# Altium PCB Tigershark 3D R2.3a - TR.PcbDoc (part 2 of 4)
Units mil, origin at the board's own origin, x right, y up, seen from the top; angles counter-clockwise.
Board outline 4100 x 4050 mil, 4 copper layers (Top Layer, Groun Plane, Power Plane, Bottom Layer), stack 61.73 mil thick; 365 components, 237 nets, 1145 pads, 790 vias.
Unrouted connection lines stored in the file: 214.
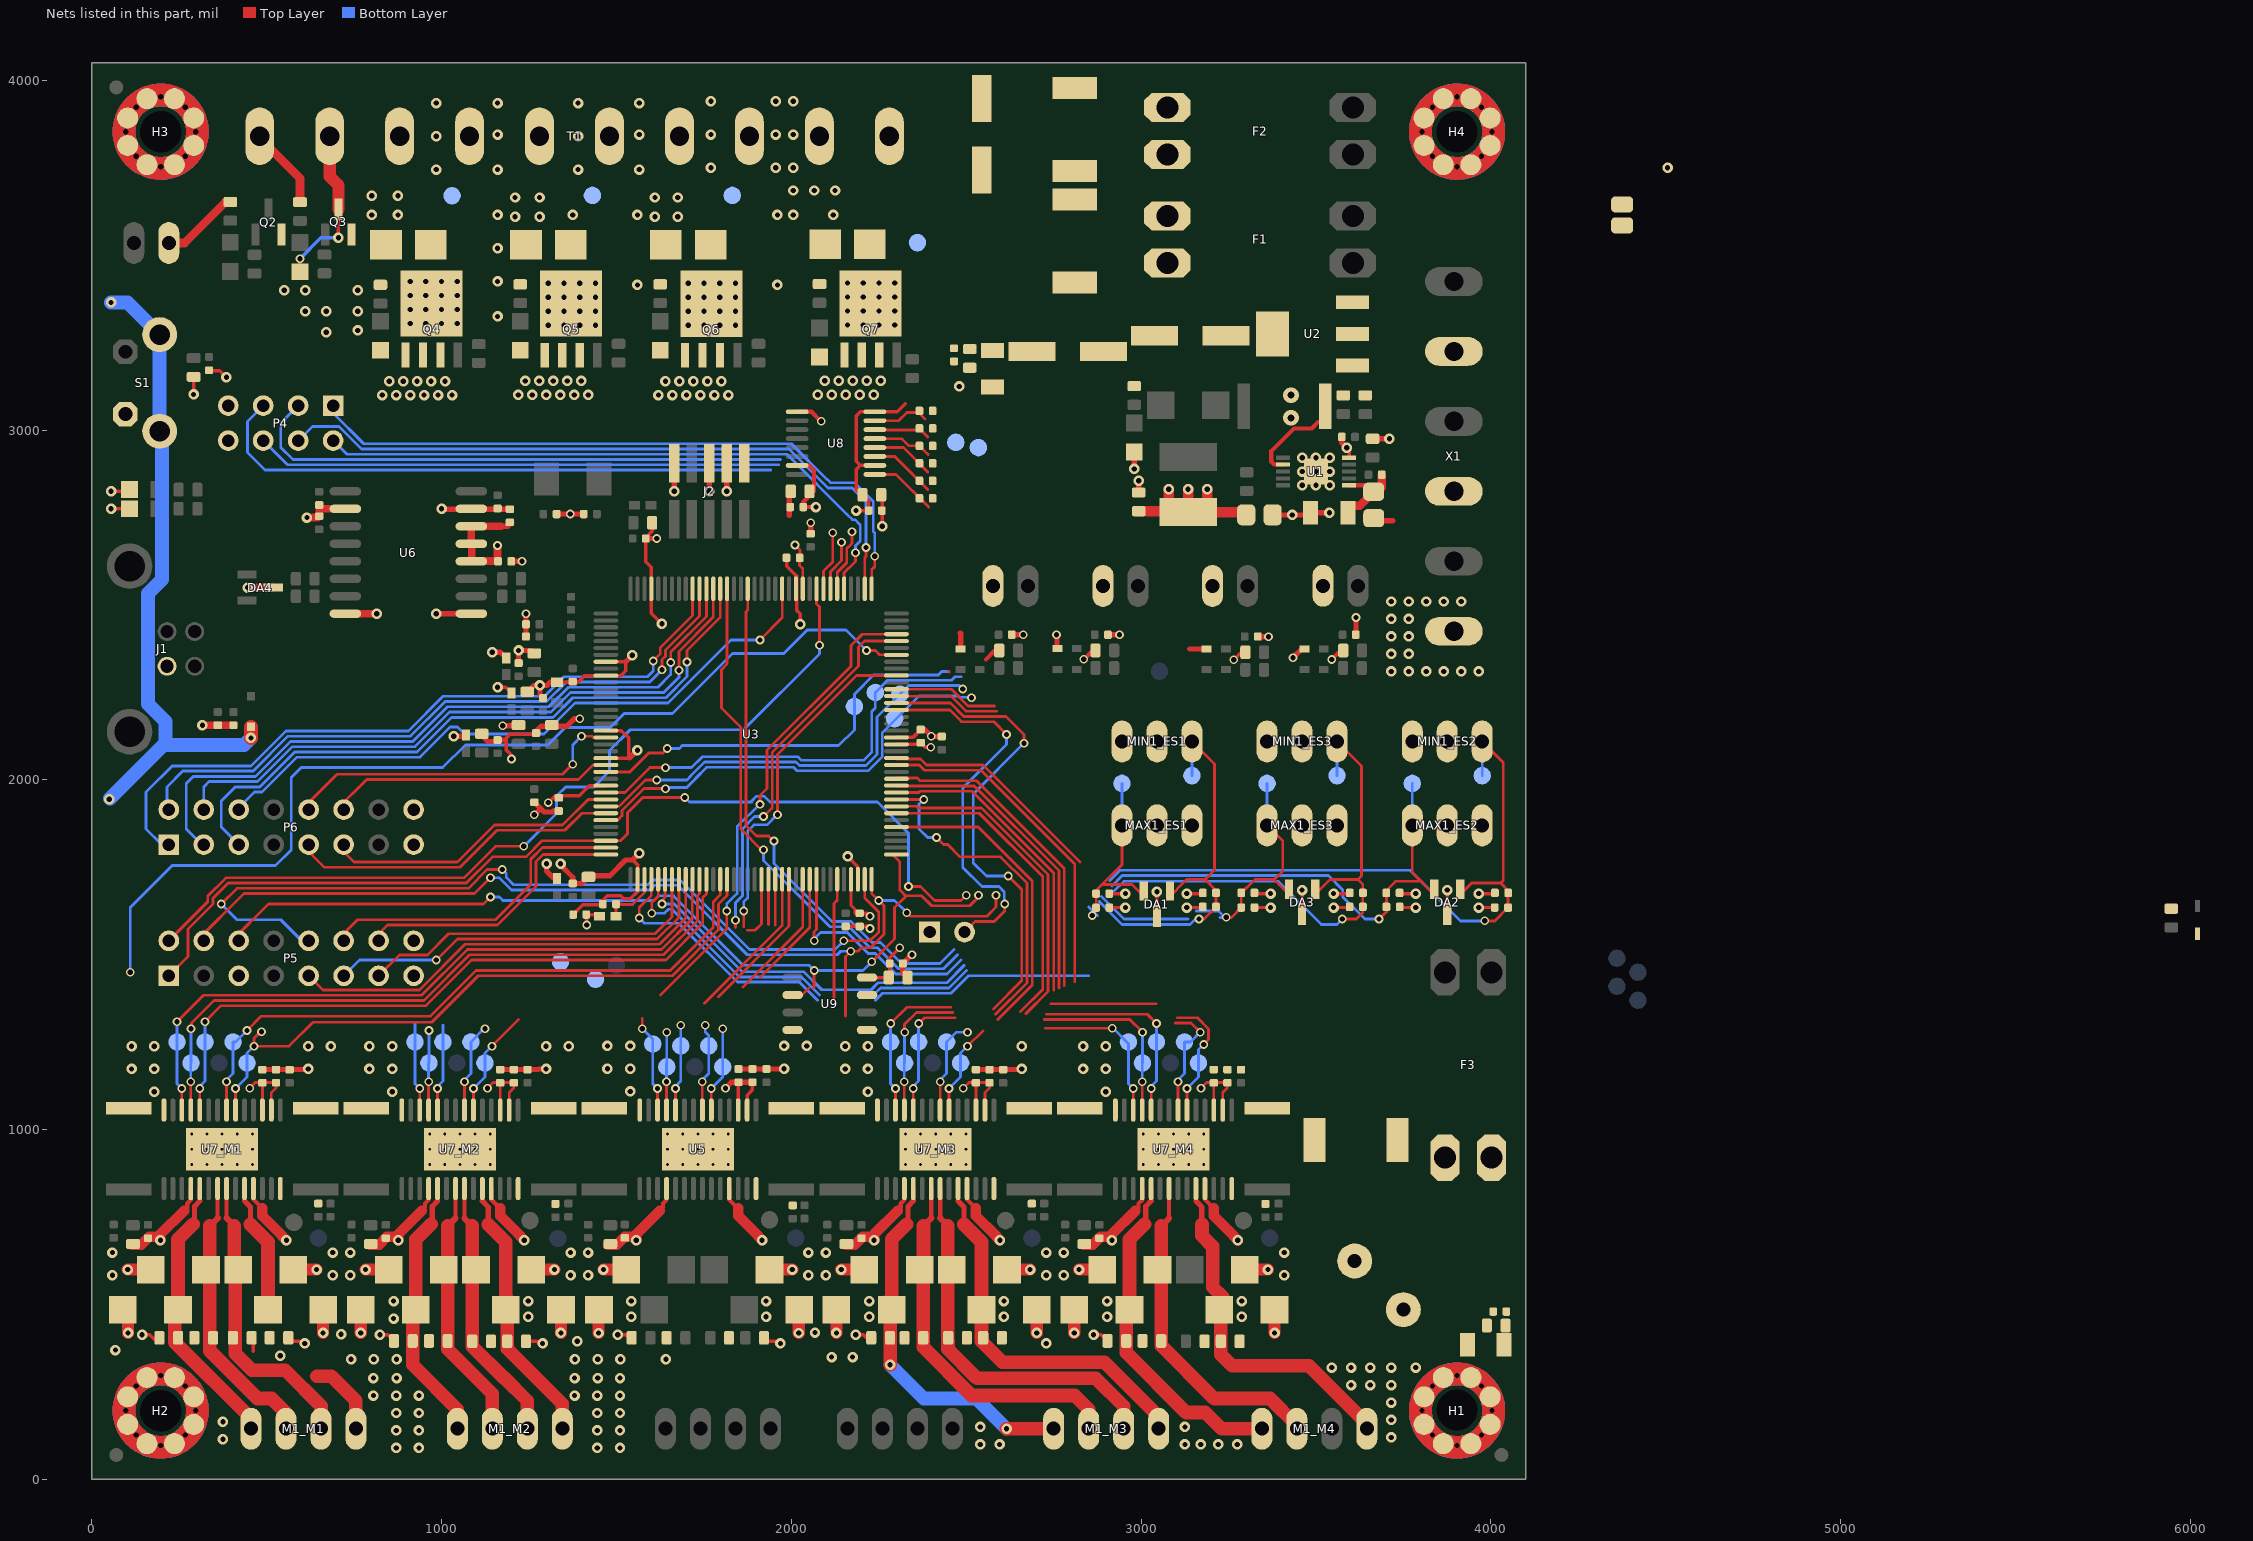
[diagram p4: the nets of this part, all layers, seen from the top]

## Via types
v1: diameter 30, hole 15, Top Layer to Bottom Layer, tented both sides, 411 vias
v2: diameter 25, hole 15, Top Layer to Bottom Layer, tented both sides, 207 vias
v3: diameter 19.68, hole 7.87, Top Layer to Bottom Layer, 75 vias
v4: diameter 30, hole 15, Top Layer to Bottom Layer, tented bottom, 64 vias
v5: diameter 25, hole 15, Top Layer to Bottom Layer, 21 vias
v6: diameter 30, hole 15, Top Layer to Bottom Layer, 9 vias
v7: diameter 45, hole 20, Top Layer to Bottom Layer, tented both sides, 2 vias
v8: diameter 25, hole 15, Top Layer to Bottom Layer, tented bottom, 1 vias

## Nets (pads, with @x,y where several pads share a name; then routed paths per layer and width w, separated by ;. In a path a pad name is that pad's centre, name@x,y a point inside that pad or via, vN(x,y) a via of type N, cw(c..) or ccw(c..) an arc to the next point about the centre after c; other vN are vias at no path point)
3.3VCC: C12_M1.2 C12_M2.2 C12_M3.2 C12_M4.2 C14_M1.2 C14_M2.2 C14_M3.2 C14_M4.2 C18.1 C25.2 C26.2 C29.2 C34.1 C45.1 C46.1 C47.1 C48.1 C56.1 C64.1 C69.2 C70.2 C74.1 FB5.1 FB6.1 FB7.1 FB8.1 FB9.1 J2.1 MAX1_ES1.3 MAX1_ES2.3 MAX1_ES3.3 MIN1_ES1.3 MIN1_ES2.3 MIN1_ES3.3 P1.1 P4.8 P5.16 P6.16 R2_ES1.2 R2_ES2.2 R2_ES3.2 R3_ES1.2 R3_ES2.2 R3_ES3.2 R6.2 R11.2 R19_TR1.2 R19_TR2.2 R19_TR3.2 R19_TR4.2 R21.2 U2.3 U3.11 U3.62 U3.105 U3.125 U5.16 U5.17 U6.12 U6.13 U6.14 U7_M1.16 U7_M1.17 U7_M2.16 U7_M2.17 U7_M3.16 U7_M3.17 U7_M4.16 U7_M4.17 U8.2 U8.8 U9.8 | length 3597.4
  Top Layer w8: v2(451.23,1118.74) 467.23,1134.74 C12_M1.2@486.23,1134.74 ; U7_M1.17@487.65,1057.2 487.65,1133.32 C12_M1.2@486.23,1134.74 ; U7_M1.16@511.23,1059.21 513.24,1057.2 513.24,1105.75 526.23,1118.74 C14_M1.2@526.23,1133.74 ; C14_M1.2@526.23,1134.74 C12_M1.2@486.23,1134.74 ; v2(1131.23,1118.74) 1147.23,1134.74 C12_M2.2@1166.23,1134.74 ; U7_M2.17@1167.65,1057.2 1167.65,1133.32 C12_M2.2@1166.23,1134.74 ; U7_M2.16@1191.23,1059.21 1193.24,1057.2 1193.24,1105.75 1206.23,1118.74 C14_M2.2@1206.23,1133.74 ; C14_M2.2@1206.23,1134.74 C12_M2.2@1166.23,1134.74 ; R6.2@1211.77,2155 R6.2@1215,2151.77 ; J2.1@1865,2904.92 J2.1@1865.08,2905 ; v2(2010.47,2671.46) 2024.47,2657.46 2024.47,2627.54 2023.56,2626.63 2023.56,2613.37 2032.64,2604.29 U3.11@2032.64,2546.46 ; U3.105@2170.43,1715.75 2170.43,1641.77 2181.1,1631.1 2181.1,1620.1 C45.1@2186.2,1615 ; v2(2491.23,1118.74) 2507.23,1134.74 C12_M3.2@2526.23,1134.74 ; U7_M3.17@2527.65,1057.2 2527.65,1133.32 C12_M3.2@2526.23,1134.74 ; U7_M3.16@2551.23,1059.21 2553.24,1057.2 2553.24,1105.75 2566.23,1118.74 C14_M3.2@2566.23,1133.74 ; C14_M3.2@2566.23,1134.74 C12_M3.2@2526.23,1134.74 ; R3_ES1.2@2909,1635 v1(2955,1635) ; v1(3130,1635) R2_ES1.2@3176,1635 ; v2(3171.23,1118.74) 3187.23,1134.74 C12_M4.2@3206.23,1134.74 ; U7_M4.17@3207.65,1057.2 3207.65,1133.32 C12_M4.2@3206.23,1134.74 ; U7_M4.16@3231.23,1059.21 3233.24,1057.2 3233.24,1105.75 3246.23,1118.74 C14_M4.2@3246.23,1133.74 ; C14_M4.2@3246.23,1134.74 C12_M4.2@3206.23,1134.74 ; R3_ES3.2@3324,1635 v1(3370,1635) ; v1(3550,1635) R2_ES3.2@3596,1635 ; R3_ES2.2@3739,1635 v1(3785,1635) ; v1(3965,1635) R2_ES2.2@4011,1635
  Top Layer w10: v1(291,3102) R21.2@291,3149.47 ; v1(1160,2265) 1183.62,2265 FB7.1@1200,2248.62 ; v2(1305,1935) 1324.5,1954.5 1393.54,1954.5 1422.51,1983.46 U3.62@1469.65,1983.46 ; v2(1415,1585) 1415,1613.7 C64.1@1413.7,1615 1446.38,1615 FB9.1@1451.38,1610 ; U5.17@1847.91,1056.94 C69.2@1847.91,1134.9 ; U5.16@1873.5,1056.94 1873.5,1098.49 1888.75,1113.74 C70.2@1888.75,1135.74 ; v1(2185,2770) C26.2@2221,2770 2221,2797.23 C25.2@2203.23,2815 ; C45.1@2195,1618.7 2216.3,1618.7 v2(2225,1610) ; C25.2@2205,2810 2185,2830 2185,2887.44 2196.58,2899.02 ; U9.8@2216.3,1435 C29.2@2278.23,1435 2281,1437.77 2281,1475 2280,1476 2280,1490 v2(2310,1520) ; U8.2@2238.78,2899.02 2196.58,2899.02 ; U3.125@2300.35,2101.57 C46.1@2365.57,2101.57 ; 2325.55,3075.55 2302.57,3052.57 U8.8@2238.78,3052.57 2197.13,3052.57 2185,3040.44 2185,2910.61 2196.58,2899.02 ; C46.1@2371,2105 2383,2093 v2(2398.5,2093) ; v2(3264.53,2343.23) 3286.3,2365 R19_TR4.2@3295,2365 ; R19_TR3.2@3574.06,2370.94 R19_TR3.2@3575,2370
  Top Layer w12: 2556,2344.57 2581.47,2370.04 R19_TR2.2@2594.23,2370.04 ; v2(2836,2344.57) 2861.47,2370.04 R19_TR1.2@2869.23,2370.04 ; v2(3544.53,2344.53) R19_TR3.2@3572.5,2372.5
  Top Layer w15: v1(1035,2125) 1059.72,2125 FB5.1@1060,2124.72 ; v1(1145,2365) 1168.62,2365 FB8.1@1185,2348.62 ; 1170,2725 1190,2725 C56.1@1201,2736 ; v2(1175,2155) 1201.77,2155 1206.77,2150 R6.2@1211.77,2155 ; v1(1300,1760) 1300,1739.72 FB6.1@1320,1719.72 ; v5(1811.26,1118.71) 1828.29,1135.74 C69.2@1848.75,1135.74 C70.2@1888.75,1135.74 ; C46.1@2370,2106 C46.1@2371,2105
  Top Layer w22: v2(1160,2670) 1160,2626 1086.12,2626 1086.12,2674 U6.13@1085.12,2675 U6.14@1085.12,2725 1170,2725
+5VCC: C11.1 C17.2 C20.2 C21.1 L1.2 R1.2 R7.2 R10.1 U2.1 U8.15 | length 691.1
  Top Layer w12: U8.15@2016.34,2899.02 2050.98,2899.02 2065,2885 2065,2825.88 2034,2794.88 2029.51,2781.51 C20.2@2029,2780 ; C20.2@2034,2780 v1(2070,2780)
  Top Layer w15: R7.2@3661.68,2975.35 3661.91,2975.57 v1(3709.69,2975.57)
  Top Layer w30: C11.1@2993,2768.23 3076.77,2768.23 3079,2766 v1(3079,2831) ; L1.2@3134,2766.52 v1(3134,2831) ; L1.2@3134.69,2765.83 C21.1@3292.02,2765.83 ; L1.2@3189,2770.83 v1(3189,2831)
+12VCC1: C7.1 C35.2 C66_M1.2 C66_M2.2 C66_M3.2 C66_M4.2 C80.1 C81.1 C82.2 D7.C F3.2 R30_M1.2 R30_M2.2 R30_M3.2 R30_M4.2 R36.2 U5.4 U5.11 U7_M1.4 U7_M1.11 U7_M2.4 U7_M2.11 U7_M3.4 U7_M3.11 U7_M4.4 U7_M4.11 | length 2331.6
  Top Layer w12: 263.75,768.74 272.75,777.74 272.75,789.25 282.92,799.42 U7_M1.4@282.92,832.8 ; U7_M1.11@462.06,832.8 462.06,800.43 487.49,775 ; 943.75,768.74 952.75,777.74 952.75,789.25 962.92,799.42 U7_M2.4@962.92,832.8 ; U7_M2.11@1142.06,832.8 1142.06,800.43 1167.49,775 ; 1623.78,768.71 1632.78,777.71 1632.78,789.22 1642.95,799.39 U5.4@1642.95,831.76 ; U5.11@1822.09,832.76 1822.09,800.4 1847.52,774.97 ; 2303.75,768.74 2312.75,777.74 2312.75,789.25 2322.92,799.42 U7_M3.4@2322.92,832.8 ; U7_M3.11@2502.06,832.8 2502.06,800.43 2527.49,775 ; 2983.75,768.74 2992.75,777.74 2992.75,789.25 3002.92,799.42 U7_M4.4@3002.92,831.8 U7_M4.4@3002.92,832.8 ; U7_M4.11@3182.06,832.8 3182.06,800.43 3207.49,775
  Top Layer w30: C66_M1.2@116.23,671.18 141.19,671.18 163.75,693.74 186.23,693.74 v1(196.23,683.74) 196.23,701.22 263.75,768.74 ; 487.49,775 487.49,753.69 544.99,696.19 544.99,694.98 v1(556.23,683.74) ; C66_M2.2@796.23,671.18 821.19,671.18 843.75,693.74 866.23,693.74 v1(876.23,683.74) 876.23,701.22 943.75,768.74 ; 1167.49,775 1167.49,753.69 1224.99,696.19 1224.99,694.98 v1(1236.23,683.74) ; C35.2@1476.26,671.15 1501.22,671.15 1523.78,693.71 1546.26,693.71 v1(1556.26,683.71) 1556.26,701.19 1623.78,768.71 ; 1847.52,774.97 1847.52,753.66 1905.02,696.16 1905.02,694.95 v1(1916.26,683.71) ; C66_M3.2@2156.23,671.18 2181.19,671.18 2203.75,693.74 2226.23,693.74 v1(2236.23,683.74) 2236.23,701.22 2303.75,768.74 ; 2527.49,775 2527.49,753.69 2584.99,696.19 2584.99,694.98 v1(2596.23,683.74) ; C66_M4.2@2836.23,671.18 2861.19,671.18 2883.75,693.74 2906.23,693.74 v1(2916.23,683.74) 2916.23,701.22 2983.75,768.74 ; 3207.49,775 3207.49,753.69 3264.99,696.19 3264.99,694.98 v1(3276.23,683.74)
  other v1: 870,90 935,90 1445,90 1510,90 2540,100 2595,100 3125,100 3170,100 3220,100 3275,100 375,115 3715,120 870,140 935,140 1445,140 1510,140 2540,150 3125,150 375,165 3715,170 870,190 935,190 1445,190 1510,190 3715,220 805,240 870,240 935,240 1380,240 1445,240 1510,240 3600,270 3655,270 3715,270 805,290 871.26,290 1380,290 1446.26,290 1510,290 3545,320 3600,320 3655,320 3715,320 3785,320 741.26,343.74 806.26,343.74 871.26,343.74 1381.26,343.74 1446.26,343.74 1511.26,343.74 1641.26,343.74 2115,350 2175,350 67.49,370 2728.75,388.74 1387.49,395 712.49,415 2067.49,420 862.49,460 1247.49,465 1542.49,465 1927.49,465 2222.49,465 2607.49,465 2902.49,465 3287.49,465 862.49,510 1247.49,510 1542.49,510 1927.49,510 2222.49,510 2607.49,510 2902.49,510 3287.49,510 58.75,583.74 688.75,583.74 738.75,583.74 1368.75,583.74 1418.75,583.74 2048.78,583.71 2098.78,583.71 2728.75,583.74 2778.75,583.74 3408.75,583.74 58.75,648.74 688.75,648.74 738.75,648.74 1368.75,648.74 1418.75,648.74 2048.78,648.71 2098.78,648.71 2728.75,648.74 2778.75,648.74 3408.75,648.74
+12VCC2: C9.1 C10.1 C16.1 C77.1 C78.1 C79.2 D6.C D12.2 D15.2 D17.2 F1.2 FAN-1.1 R13.2 R17.2 R47.2 R56.2 R60.2 R64.2 T1.1 T1.3 T1.5 T1.7 U1.1 | length 632.5
  Top Layer w12: U1.1@3594.17,2842.2 3638.17,2842.2 C10.1@3647.32,2833.05
  Top Layer w24: C9.1@3610.85,2783.57 3624.63,2783.57 3657.03,2815.98 C10.1@3668.69,2815.98 ; C10.1@3687.69,2834.98 R17.2@3687.69,2872.57
  Top Layer w25: FAN-1.1@230,3535 265,3535 382.34,3652.34 R13.2@396,3652.34 ; T1.1@480,3810 T1.1@495,3795 ; T1.1@480,3835 595,3720 R47.2@595,3651.77
  other v1: 1210,3610 1280,3610 1610,3610 1675,3610 800,3615 875,3615 1210,3665 1280,3665 1610,3665 1675,3665 800,3670 875,3670
+12VCC3: C15.1 D4.C D19.2 F2.2 R68.2 T1.9
  other v1: 2005,3615 2120,3615 2005,3685 2065,3685 2125,3685 2005,3750 4505,3750 2005,3845 2005,3940
AVREF: C65.1 FB9.2 U3.75 | length 168.5
  Top Layer w8: FB9.2@1498.62,1610 1498.62,1644.62 1499,1645 1513.47,1645 1514.47,1644 1546.24,1644 1579.88,1677.64 U3.75@1579.88,1715.75
BED_PWM: R71.2 TP38.1 U3.132 U8.7 | length 462.9
  Top Layer w8: U8.7@2238.78,3026.98 2306.98,3026.98 2330,3050 R71.2@2358.23,3050 ; U3.132@2300.35,2239.37 2456.18,2239.37 2499.05,2196.5 2586.5,2196.5 ; R71.2@2366,3055 2366,3047.22 2381.72,3031.5
DIR1: TP39_M1.1 U3.87 U7_M1.20 | length 1872.3
  Top Layer w8: U7_M1.20@410.88,1057.2 v2(410.88,1117.64) ; v2@482.49,1280 463.75,1261.26 v2(463.75,1238.74) 563.74,1238.74 632.24,1307.24 971.83,1307.24 1104.59,1440 1659.71,1440 1791.5,1571.79 1791.5,1644.73 1816.1,1669.34 U3.87@1816.1,1715.75
  Bottom Layer w8: v2(410.88,1117.64) 443.72,1150.48 TP39_M1.1@443.72,1190.77 443.72,1218.71 v2(463.75,1238.74)
  other v2: 485,1280
DIR2: TP39_M2.1 U3.93 U7_M2.20 | length 440.2
  Top Layer w8: U7_M2.20@1090.88,1057.2 v2(1090.88,1117.64) ; v2(1143.75,1238.74) 1220.01,1315 ; 1934.21,1586.79 U3.93@1934.21,1715.75
  Bottom Layer w8: v2(1090.88,1117.64) 1123.72,1150.48 TP39_M2.1@1123.72,1190.77 1123.72,1218.71 v2(1143.75,1238.74)
DIR3: TP39_M3.1 U3.116 U7_M3.20 | length 1203.5
  Top Layer w8: U3.116@2300.35,1924.41 2357.8,1924.41 2362.48,1919.72 2543.36,1919.72 2733.5,1729.59 2733.5,1395.01 2670,1331.51 ; U7_M3.20@2450.88,1057.2 v2(2450.88,1117.64) ; v2(2503.75,1238.74) 2547.49,1282.48
  Bottom Layer w8: v2(2450.88,1117.64) 2483.72,1150.48 TP39_M3.1@2483.72,1190.77 2483.72,1218.71 v2(2503.75,1238.74)
DIR4: TP39_M4.1 U3.123 U7_M4.20 | length 1006.1
  Top Layer w8: U3.123@2300.35,2062.2 2302.56,2060 2369.33,2060 2386.74,2042.59 2547.77,2042.59 2825,1765.37 ; 3103.7,1320 3160.72,1320 3192.49,1288.23 3192.49,1257.54 v2(3178.72,1243.77) ; U7_M4.20@3130.88,1057.2 v2(3130.88,1117.64)
  Bottom Layer w8: v2(3130.88,1117.64) 3163.72,1150.48 TP39_M4.1@3163.72,1190.77 3163.72,1228.77 v2(3178.72,1243.77)
DIR_EXP1: P6.11 U3.64 | length 864.5
  Top Layer w8: P6.11@700,1815 750,1765 1045.7,1765 1151.68,1870.98 1345.98,1870.98 1419.09,1944.09 U3.64@1469.65,1944.09
DIR_EXP2: P6.12 U3.59 | length 822.5
  Top Layer w8: P6.12@700,1915 786,2001 1391,2001 1432.52,2042.52 U3.59@1469.65,2042.52
DIR_Z: TP20.1 U3.99 U5.20 | length 582.8
  Top Layer w8: U5.20@1770.91,1057.17 v5(1770.91,1117.61) ; 1911.26,1436.55 2052.32,1577.62 U3.99@2052.32,1715.75
  Bottom Layer w8: v5(1770.91,1117.61) 1803.75,1150.45 TP20.1@1803.75,1179.74 v5(1803.75,1288.74)
EN1: TP32_M1.1 U3.86 U7_M1.21 | length 1855.5
  Top Layer w8: U7_M1.21@385.29,1057.2 v2(385.29,1137.05) ; v2(443.75,1283.74) 484.48,1324.47 967.85,1324.47 1098.38,1455 1653.49,1455 1776.5,1578.01 1776.5,1650.95 1796.42,1670.86 U3.86@1796.42,1715.75
  Bottom Layer w8: v2(385.29,1137.05) 385.29,1142.34 403.72,1160.77 TP32_M1.1@403.72,1250.77 410.78,1250.77 v2(443.75,1283.74)
EN2: TP32_M2.1 U3.92 U7_M2.21 | length 429.9
  Top Layer w8: U7_M2.21@1065.29,1057.2 v2(1065.29,1137.05) ; 1874.56,1570 1896.21,1570 1914.53,1588.31 U3.92@1914.53,1715.75
  Bottom Layer w8: v2(1065.29,1137.05) 1065.29,1142.34 1083.72,1160.77 TP32_M2.1@1083.72,1250.77 v2@1121.69,1288.74
  other v2: 1123.75,1288.74
EN3: TP32_M3.1 U3.115 U7_M3.21 | length 1178
  Top Layer w8: U3.115@2300.35,1904.72 2537.15,1904.72 2718.5,1723.37 2718.5,1401.22 2655,1337.72 ; U7_M3.21@2425.29,1057.2 v2(2425.29,1137.05)
  Bottom Layer w8: v2(2425.29,1137.05) 2425.29,1142.34 2443.72,1160.77 TP32_M3.1@2443.72,1250.77 2471.69,1278.74 v2(2503.75,1278.74)
EN4: TP32_M4.1 U3.122 U7_M4.21 | length 1603.5
  Top Layer w8: U3.122@2300.35,2042.52 2365.6,2042.52 2380.52,2027.59 2541.56,2027.59 2810,1759.15 2810,1423.79 ; 2741.28,1360 3042.49,1360 ; 3097.49,1305 3142.49,1305 v2(3168.72,1278.77) ; U7_M4.21@3105.29,1057.2 v2(3105.29,1137.05)
  Bottom Layer w8: v2(3105.29,1137.05) 3105.29,1142.34 3123.72,1160.77 TP32_M4.1@3123.72,1250.77 3140.72,1250.77 v2(3168.72,1278.77)
EN_EXP1: P6.9 U3.66 | length 960.7
  Top Layer w8: P6.9@600,1815 665,1750 1051.91,1750 1157.9,1855.98 1352.2,1855.98 1400.94,1904.72 U3.66@1469.65,1904.72
EN_EXP2: P6.10 U3.55 | length 990.4
  Top Layer w8: P6.10@600,1915 701,2016 1346,2016 v2(1375,2045) ; v2(1400,2125) 1430,2125 1433.74,2121.26 U3.55@1469.65,2121.26
  Bottom Layer w8: v2(1375,2045) 1375,2100 v2(1400,2125)
EN_Z: TP16.1 U3.98 U5.21 | length 632.3
  Top Layer w8: U5.21@1745.32,1057.17 v5(1745.32,1137.02) ; 1861.26,1407.77 2032.64,1579.15 U3.98@2032.64,1715.75
  Bottom Layer w8: v5(1745.32,1137.02) 1745.32,1142.31 1763.75,1160.74 1763.75,1268.74 1753.75,1278.74 v5(1753.75,1298.74)
ERASE: P1.2 U3.130 | length 1118.2
  Top Layer w8: U3.130@2300.35,2200 2453.13,2200 2486.63,2166.5 2578.5,2166.5 v2(2615,2130) ; P1.2@2495,1565 2525,1595 2580,1595 2610,1625 v2(2610,1645)
  Bottom Layer w8: v2(2610,1645) 2608.5,1646.5 2608.5,1679.73 2593.23,1695 2545,1695 2490,1750 2490,1976.36 2615,2101.36 v2(2615,2130)
EXP_CS2: P5.5 U3.138 | length 2854.3
  Top Layer w8: v2(2215,2370) 2240,2370 2252.52,2357.48 U3.138@2300.35,2357.48
  Bottom Layer w8: v2(110,1450) 110,1635 230,1755 525,1755 570,1800 570,2006.36 598.64,2035 1002.98,2035 1067.98,2100 1303.49,2100 1353.49,2150 1482.16,2150 1522.16,2190 1659.85,2190 1831.35,2361.5 1978.27,2361.5 2045.27,2428.5 2156.5,2428.5 v2(2215,2370)
FET_PWM1: R46.2 TP43.1 U3.60 U8.1 | length 1351.7
  Top Layer w8: U3.60@1469.65,2022.83 1537.83,2022.83 1592.1,2077.1 1632.1,2077.1 v2(1645,2090) ; U8.1@2238.78,2873.43 2299.22,2873.43 2392.66,2780 ; 2450,2310 2451.5,2308.5
  Bottom Layer w8: v2(1645,2090) 1680,2090 1687.89,2097.89 2132.89,2097.89 ; 2135,2097.89 2180,2142.89 2180,2245 2235,2300 2420,2300 2430,2310 2450,2310
FET_PWM2: R55.2 TP44.1 U3.63 U8.3 | length 1445.3
  Top Layer w8: U3.63@1469.65,1963.78 1524.03,1963.78 1595.25,2035 v2(1640,2035) ; U8.3@2238.78,2924.61 2295.39,2924.61 2390,2830
  Bottom Layer w8: v2(1640,2035) 1664.23,2035 ; 1664.23,2035.1 1714.44,2035.1 1745.23,2065.89 2019.11,2065.89 2029.11,2055.89 2206.56,2055.89 2230,2079.33 2230,2196.21 2240,2206.21 TP44.1@2240,2250 2275,2285 2458.23,2285 2468.23,2295 2485,2295
FET_PWM3: R59.2 TP45.1 U3.65 U8.4 | length 1419.2
  Top Layer w8: U3.65@1469.65,1924.41 1506.98,1924.41 1582.57,2000 v2(1615,2000) ; U8.4@2238.78,2950.2 2238.98,2950 2320,2950 2390,2880
  Bottom Layer w8: v2(1615,2000) 1701.21,2000 1711.5,2010.29 1711.5,2010.95 1751.44,2050.89 2012.9,2050.89 2022.9,2040.89 2212.77,2040.89 2245,2073.12 2245,2180 2335,2270 2480,2270 v2(2490,2260)
FET_PWM4: R63.2 TP46.1 U3.67 U8.5 | length 1422.7
  Top Layer w8: U3.67@1469.65,1885.04 1503.4,1885.04 1516.08,1897.72 1516.08,1912.29 1578.79,1975 v2(1640,1975) ; U8.5@2238.78,2975.8 2239.58,2975 2316.21,2975 2336.21,2955 R63.2@2366,2955 2391,2930
  Bottom Layer w8: v2(1640,1975) 1643.5,1978.5 1700.93,1978.5 1726.5,2004.07 1726.5,2004.73 1757.66,2035.89 2006.68,2035.89 2016.68,2025.89 2218.98,2025.89 2260,2066.91 2260,2135 2365,2240 2476.77,2240 2480.27,2236.5 2513.5,2236.5 v2(2515,2235)
FET_PWM5: R67.2 TP47.1 U3.133 U8.6 | length 460.4
  Top Layer w8: U8.6@2238.78,3001.39 2240.17,3000 R67.2@2365,3000 ; U3.133@2300.35,2259.06 2457.71,2259.06 2505.27,2211.5 2580.29,2211.5 ; R67.2@2366,3004 2390,2980
FGND: D8.C H1.1 H2.1 H3.1 H4.1 JP1.1 S1.3 S1.4 | length 1915.5
  Top Layer w40: v1(455,2120) D8.C@455,2151.69
  Bottom Layer w40: v1@52,1947 205,2100 435,2100 v1(455,2120) ; v1(55,3365) 102,3365 S1.3@194,3273 S1.4@194,2997 200.25,2990.75 200.25,2572.95 160,2532.7 160,2216.4 210,2166.4 210,2105
  Bottom Layer w50: 122.6,271.1 H2.1@126.85,266.85 ; 122.6,3778.9 H3.1@126.85,3783.15 ; 3828.9,3927.4 H4.1@3833.15,3923.15 ; H1.1@3973.15,266.85 3977.4,271.1
  other v1: 50,1945
FN1: D11.C Q3.3 T1.2 | length 467.3
  Top Layer w10: D11.C@595,3453 v2(595,3490) ; v1(705,3549.78) Q3.3@705,3630.43
  Top Layer w35: T1.2@680,3835 680,3725 705,3700 Q3.3@705,3630.43
  Bottom Layer w10: v2(595,3490) 654.78,3549.78 v1(705,3549.78)
GND: C1_ES1.1 C1_ES2.1 C1_ES3.1 C2_ES1.1 C2_ES2.1 C2_ES3.1 C3_M1.2 C3_M2.2 C3_M3.2 C3_M4.2 C5_M1.2 C5_M2.2 C5_M3.2 C5_M4.2 C6_M1.2 C6_M2.2 C6_M3.2 C6_M4.2 C7.2 C8_M1.2 C8_M2.2 C8_M3.2 C8_M4.2 C9.2 C10.2 C11.2 C12_M1.1 C12_M2.1 C12_M3.1 C12_M4.1 C13.1 C14_M1.1 C14_M2.1 C14_M3.1 C14_M4.1 C15.2 C16.2 C17.1 C18.2 C20.1 C21.2 C22.2 C23.2 C25.1 C26.1 C27.2 C28.1 C29.1 C30_TR1.2 C30_TR2.2 C30_TR3.2 C30_TR4.2 C32.1 C33.2 C34.2 C36.1 C37.2 C38.2 C39.2 C41.2 C42.2 C43.1 C44.1 C45.2 C46.2 C47.2 C48.2 C50.1 C51.1 C52.2 C53.2 C54.2 C55.1 C56.2 C57.2 C60.1 C61.2 C62.2 C63.1 C64.2 C65.2 C67.2 C69.1 C70.1 C71_M1.1 C71_M2.1 C71_M3.1 C71_M4.1 C72.2 C73.1 C74.2 C75_M1.1 C75_M2.1 C75_M3.1 C75_M4.1 C77.2 C78.2 C79.1 C80.2 C81.2 C82.1 D1.1 D4.A D5_TR1.A D5_TR2.A D5_TR3.A D5_TR4.A D6.A D7.A D20_M1.C D20_M2.C D20_M3.C D20_M4.C D21_M1.C D21_M2.C D21_M3.C D21_M4.C D22_M1.C D22_M2.C D22_M3.C D22_M4.C D23_M1.C D23_M2.C D23_M3.C D23_M4.C D24.C D25.C D26.C D27.C D28.C D29.C DA1.3 DA2.3 DA3.3 J2.3 J2.5 J2.9 JP1.2 LED1.C MAX1_ES1.2 MAX1_ES2.2 MAX1_ES3.2 MIN1_ES1.2 MIN1_ES2.2 MIN1_ES3.2 P2_TR1.2 P2_TR2.2 P2_TR3.2 P2_TR4.2 P4.7 P5.15 P6.15 Q2.2 Q3.2 Q4.1 Q4.2 Q4.3 Q5.1 Q5.2 Q5.3 Q6.1 Q6.2 Q6.3 Q7.1 Q7.2 Q7.3 R4.2 R9.1 R12.2 R23.1 R32_M1.1 R32_M2.1 R32_M3.1 R32_M4.1 R33_M1.1 R33_M2.1 R33_M3.1 R33_M4.1 R38.1 R39.1 R46.1 R55.1 R59.1 R63.1 R67.1 R71.1 S1.2 U1.5 U1.7 U1.11 U2.2 U2.4 U3.12 U3.33 U3.44 U3.46 U3.54 U3.58 U3.74 U3.106 U3.126 U5.14 U5.28 U5.29 U6.9 U6.15 U7_M1.14 U7_M1.28 U7_M1.29 U7_M2.14 U7_M2.28 U7_M2.29 U7_M3.14 U7_M3.28 U7_M3.29 U7_M4.14 U7_M4.28 U7_M4.29 U8.9 U9.4 X1.2 X1.4 X1.6 | length 7664.7
  Top Layer w10: v1(55,2775) D29.C@108,2775 ; v1(55,2825) 103,2825 D24.C@108,2830 ; v1(143.75,413.74) 165.98,413.74 C3_M1.2@183.72,396 ; C63.1@335,3170 366,3170 v1(385,3151) ; 461.26,366.23 C8_M1.2@461.26,395 ; C6_M1.2@561.26,395 592.49,395 v1@608.75,378.74 ; v1(823.75,413.74) 845.98,413.74 C3_M2.2@863.72,396 ; 1179.12,2113.7 1185.42,2120 ; v2@1200,2070 1185.42,2084.58 1185.42,2120 ; C6_M2.2@1241.26,395 1272.49,395 v1@1288.75,378.74 ; C37.2@1265,2130 1195.42,2130 1185.42,2120 ; R4.2@1319.97,2279.53 1389.88,2279.53 1408.78,2298.43 U3.46@1469.65,2298.43 1513.43,2298.43 1526.69,2311.69 1526.69,2331.75 1526.69,2337.8 U3.44@1469.65,2337.8 ; C64.2@1376,1615 1403.76,1642.76 C65.2@1455,1642.76 ; C65.2@1455,1650 1474,1669 1512.09,1669 1521.09,1660 1539.61,1660 1560.2,1680.58 U3.74@1560.2,1715.75 1560.2,1757.01 1546.1,1771.1 ; U3.58@1469.65,2062.2 1537.2,2062.2 ; U3.54@1469.65,2140.94 1514.06,2140.94 1535,2120 1535,2065 1537.5,2062.5 ; v1(1503.78,413.71) 1526.01,413.71 C52.2@1543.75,395.97 ; C33.2@1583.7,2693.91 1583.7,2623.86 1599.57,2607.99 U3.33@1599.57,2546.46 1599.57,2476.26 v1(1629.72,2446.1) ; C33.2@1585,2693.91 1602.56,2711.47 C32.1@1602.56,2726.1 ; C67.2@1921.29,394.97 1952.52,394.97 v1@1968.78,378.71 ; C47.2@1986.3,2635 1986.3,2611.27 2012.95,2584.61 U3.12@2012.95,2546.46 ; 2014.73,2583.4 2014.73,2485.27 2025,2475 v1(2025,2445) ; C23.2@2155,1581 C45.2@2195,1581 2219,1581 v2(2225,1575) ; v1(2161.1,1781.1) 2190.12,1752.09 U3.106@2190.12,1715.75 ; v1(2183.75,413.74) 2205.98,413.74 C3_M3.2@2223.72,396 ; C25.1@2256.77,2815 2260,2811.77 v1(2260,2725) ; U3.126@2300.35,2121.26 2347.56,2121.26 C46.2@2370,2143.7 ; v1(2863.75,413.74) 2885.98,413.74 C3_M4.2@2903.72,396 ; C2_ES1.1@2917.56,1675 v1(2955,1675) ; DA1.3@3045,1592.6 v1(3045,1680) ; v1(3130,1675) C1_ES1.1@3167.91,1675 ; C2_ES3.1@3324,1675 v1(3370,1675) ; DA3.3@3460,1597.6 v1(3460,1685) ; v1(3550,1675) C1_ES3.1@3587.91,1675 ; U1.5@3594.17,2920.94 v1@3594.17,2943.09 ; C2_ES2.1@3738.7,1675 v1(3785,1675) ; DA2.3@3875,1597.6 v1(3875,1685) ; v1(3965,1675) C1_ES2.1@4002.91,1675
  Top Layer w12: U8.9@2016.34,3052.57 2057.43,3052.57 v2(2085,3025) ; U1.7@3405.2,2901.26 3380.51,2901.26 3372.12,2909.65 3372.12,2940.13 3436.58,3004.59 3487.64,3004.59 3506.05,3023
  Top Layer w15: C12_M1.1@487.49,1171.7 C14_M1.1@526.49,1171.7 C71_M1.1@565.49,1171.7 616.71,1171.7 v1(618.75,1173.74) ; v1(985,2475) U6.9@1085.12,2475 ; v1(1000,2775) 1001.3,2773.7 C56.2@1200,2773.7 ; C55.1@1110,2131.77 1131.77,2110 C54.2@1151.3,2110 ; C54.2@1160,2113.7 1179.12,2113.7 ; C12_M2.1@1167.49,1171.7 C14_M2.1@1206.49,1171.7 C71_M2.1@1245.49,1171.7 1276.71,1171.7 1278.75,1173.74 v1(1298.75,1173.74) ; C74.2@1198.7,2625 v2(1230,2625) ; C61.2@1220,2333.7 v1(1220,2370) 1256.77,2370 C60.1@1265,2361.77 ; R23.1@1241.1,2410 v2(1241.1,2475) ; C28.1@1246.22,2252.56 1263.66,2270 v1(1281.22,2270) ; v2(1265,1900) 1265.82,1900 1283.56,1917.74 ; C37.2@1265,2133.7 1284.96,2153.66 1358.66,2153.66 1380,2175 v2(1395,2175) ; C53.2@1291.22,2233.7 1281.22,2243.7 v1(1281.22,2270) ; 1310.75,2279.53 1301.22,2270 v1(1281.22,2270) ; C43.1@1328.7,2760 C44.1@1406.3,2760 ; C48.2@1335,1911.3 1319.48,1911.3 1316.18,1908 1293.3,1908 1290,1911.3 1283.56,1917.74 ; v1(1340,1760) 1340,1756.69 1375,1721.69 1375,1703.7 1400.04,1703.7 1422.44,1726.1 1481.1,1726.1 1526.1,1771.1 1546.1,1771.1 v1(1565,1790) ; 1526.69,2337.8 v1(1545,2356.1) ; 1537.5,2062.5 v1(1560,2085) ; C33.2@1588.91,2690 v2(1615,2690) ; v1(1665,2825) J2.9@1665,2904.92 ; v1(1765,2825) J2.5@1765,2904.92 ; v1(1815,2825) 1815,2894.92 1820,2899.92 J2.3@1815,2904.92 ; C69.1@1848.75,1173.44 C70.1@1888.75,1173.44 C50.1@1928.75,1173.44 1977.97,1173.44 v1(1979.01,1174.48) ; 1994,2756 C17.1@1994,2810 ; C38.2@2055,2708.7 v2(2055,2735) ; C29.1@2331.77,1435 2318.7,1448.07 2318.7,1475 2345,1501.3 v2(2345,1500) ; C46.2@2370,2143.7 2381.3,2143.7 v2(2400,2125) 2400,2128.7 2404.35,2124.35 C39.2@2434.35,2124.35 ; 2483.05,2420.05 2484.43,2418.67 D5_TR2.A@2484.43,2374.57 ; C12_M3.1@2527.49,1171.7 C14_M3.1@2566.49,1171.7 C71_M3.1@2605.49,1171.7 2656.71,1171.7 v1(2658.75,1173.74) ; C30_TR2.2@2630,2415.05 v2(2663.05,2415.05) ; v2(2758.05,2415.05) 2759.43,2413.67 D5_TR1.A@2759.43,2374.57 ; C30_TR1.2@2905,2415.05 v2(2938.05,2415.05) ; v1@2980,2894 LED1.C@2980,2937 ; C11.2@2993,2821.77 v1(2993,2855) ; 3139.06,2374.53 D5_TR4.A@3187.95,2374.53 ; C30_TR4.2@3333.53,2410 3334,2409.53 v2(3364.06,2409.53) ; C21.2@3375.69,2757.57 v1(3431.69,2757.57) C9.2@3478.54,2757.57 ; v2(3434.06,2349.53) 3459.06,2374.53 D5_TR3.A@3467.95,2374.53 ; C9.2@3484.54,2763.57 v1(3538.24,2763.57) ; C22.2@3573.69,2980.57 3573.69,2963.57 v1@3594.17,2943.09 ; C30_TR3.2@3613.53,2415 3614.06,2415.53 v2(3614.06,2464.53) ; C10.2@3668.69,2740.57 3720.24,2740.57 ; 1283.56,1917.74 1270,1931.3 1283.56,1917.74
  Top Layer w35: D20_M1.C@88.75,485 103.75,470 v1(103.75,418.74) ; v1(102.49,600) D21_M1.C@168.75,600 ; D23_M1.C@576.23,600 v1(642.49,600) ; v1(661.23,418.74) D22_M1.C@661.23,485 ; v1(768.75,418.74) D20_M2.C@768.75,485 ; v1(782.49,600) D21_M2.C@848.75,600 ; D23_M2.C@1256.23,600 v1(1322.49,600) ; v1(1341.23,418.74) D22_M2.C@1341.23,485 ; v1(1448.78,418.71) D25.C@1448.78,484.97 ; v1(1462.52,599.97) D26.C@1528.78,599.97 ; D28.C@1936.26,599.97 v1(2002.52,599.97) ; v1(2021.26,418.71) D27.C@2021.26,484.97 ; v1(2128.75,418.74) D20_M3.C@2128.75,485 ; v1(2142.49,600) D21_M3.C@2208.75,600 ; D23_M3.C@2616.23,600 v1(2682.49,600) ; v1(2701.23,418.74) D22_M3.C@2701.23,485 ; v1(2808.75,418.74) D20_M4.C@2808.75,485 ; v1(2822.49,600) D21_M4.C@2888.75,600 ; D23_M4.C@3296.23,600 v1(3362.49,600) ; v1(3381.23,418.74) D22_M4.C@3381.23,485
  other v1: 538.77,353.74 608.75,388.74 1288.75,388.74 1968.78,388.71 178.75,1108.74 858.75,1108.74 1539.01,1109.48 2218.75,1108.74 2898.75,1108.74 113.75,1173.74 178.75,1173.74 793.75,1173.74 858.75,1173.74 1474.01,1174.48 1539.01,1174.48 2153.75,1173.74 2218.75,1173.74 2833.75,1173.74 2898.75,1173.74 113.75,1238.74 178.75,1238.74 618.75,1238.74 683.75,1238.74 793.75,1238.74 858.75,1238.74 1298.75,1238.74 1363.75,1238.74 1474.01,1239.48 1539.01,1239.48 1979.01,1239.48 2044.01,1239.48 2153.75,1238.74 2218.75,1238.74 2658.75,1238.74 2833.75,1238.74 2898.75,1238.74 3715,2310 3765,2310 3815,2310 3865,2310 3915,2310 3965,2310 3715,2360 3765,2360 3715,2410 3765,2410 3715,2460 3765,2460 3715,2510 3765,2510 3815,2510 3865,2510 3915,2510 2980,2889 3587.69,2949.57 830,3100 870,3100 910,3100 950,3100 990,3100 1030,3100 1219,3100.42 1259,3100.42 1299,3100.42 1339,3100.42 1379,3100.42 1419,3100.42 1620,3100 1660,3100 1700,3100 1740,3100 1780,3100 1820,3100 2075.5,3100.81 2115.5,3100.81 2155.5,3100.81 2195.5,3100.81 2235.5,3100.81 2480,3125 850,3140 890,3140 930,3140 970,3140 1010,3140 1239,3140.42 1279,3140.42 1319,3140.42 1359,3140.42 1399,3140.42 1640,3140 1680,3140 1720,3140 1760,3140 1800,3140 2095.5,3140.81 2135.5,3140.81 2175.5,3140.81 2215.5,3140.81 2255.5,3140.81 670,3280 760,3285 610,3340 670,3340 760,3340 550,3400 610,3400 760,3400
  other v2: 1200,2060 1367.5,2760
  other v3: 285.88,900.69 329.18,900.69 372.49,900.69 415.8,900.69 459.1,900.69 965.88,900.69 1009.18,900.69 1052.49,900.69 1095.8,900.69 1139.1,900.69 1646.14,900.69 1689.44,900.69 1732.75,900.69 1776.06,900.69 1819.36,900.69 2325.88,900.69 2369.18,900.69 2412.49,900.69 2455.8,900.69 2499.1,900.69 3005.88,900.69 3049.18,900.69 3092.49,900.69 3135.8,900.69 3179.1,900.69 285.88,944 329.18,944 372.49,944 415.8,944 459.1,944 965.88,944 1009.18,944 1052.49,944 1095.8,944 1139.1,944 1646.14,944 1689.44,944 1732.75,944 1776.06,944 1819.36,944 2325.88,944 2369.18,944 2412.49,944 2455.8,944 2499.1,944 3005.88,944 3049.18,944 3092.49,944 3135.8,944 3179.1,944 285.88,987.31 329.18,987.31 372.49,987.31 415.8,987.31 459.1,987.31 965.88,987.31 1009.18,987.31 1052.49,987.31 1095.8,987.31 1139.1,987.31 1646.14,987.31 1689.44,987.31 1732.75,987.31 1776.06,987.31 1819.36,987.31 2325.88,987.31 2369.18,987.31 2412.49,987.31 2455.8,987.31 2499.1,987.31 3005.88,987.31 3049.18,987.31 3092.49,987.31 3135.8,987.31 3179.1,987.31
  other v6: 3460.32,2842.2 3499.69,2842.2 3539.06,2842.2 3460.32,2881.57 3499.69,2881.57 3539.06,2881.57 3460.32,2920.94 3499.69,2920.94 3539.06,2920.94
  other v7: 3428,3035 3428,3100
GPIO_P_0: P4.1 U3.1 | length 1904.3
  Top Layer w8: U3.1@2230,2546.97 U3.1@2229.49,2546.46 2229.49,2600.7 2238.31,2609.52 v2(2238.31,2639.52)
  Bottom Layer w8: P4.1@690,3048.53 777.53,2961 1999.66,2961 2102.16,2858.5 2102.71,2858.5 2111.5,2849.71 2180.29,2849.71 2234,2796 2234,2709.92 2238.31,2705.62 v2(2238.31,2639.52)
GPIO_P_1: P4.3 U3.6 | length 1763.9
  Top Layer w8: U3.6@2131.06,2546.46 2131.06,2593.64 2158.31,2620.88 2158.31,2661.29 2173.31,2676.29 v2(2173.31,2709.52)
  Bottom Layer w8: P4.3@590,3070 540,3020 540,2950.72 574.72,2916 1969,2916
GPIO_P_2: P4.5 U3.8 | length 1840.1
  Top Layer w8: U3.8@2091.69,2546.46 2091.69,2596.69 2118.31,2623.31 v2(2118.31,2706.29)
  Bottom Layer w8: P4.5@490,3070 445,3025 445,2935.72 494.72,2886 1940.77,2886
GPIO_P_3: P4.2 U3.5 | length 1808
  Top Layer w8: U3.5@2150.75,2546.46 2150.75,2592.11 2183.31,2624.67 v2(2183.31,2649.52)
  Bottom Layer w8: P4.2@690,2970 729,2931 1987.23,2931 2159,2759.23 2174.23,2744 2181.31,2744 2196.81,2728.5 2196.81,2683.02 2183.31,2669.52 v2(2183.31,2649.52)
GPIO_P_4: P4.4 U3.2 | length 1979.9
  Top Layer w8: U3.2@2210,2546.65 U3.2@2209.8,2546.46 2209.8,2635 2213.31,2638.5 v2(2213.31,2664.52)
  Bottom Layer w8: P4.4@590,2970 630.53,3010.53 706.79,3010.53 771.31,2946 1993.45,2946 2104.73,2834.71 2174.07,2834.71 2213.31,2795.48 v2(2213.31,2664.52)
GPIO_P_5: P4.6 U3.7 | length 1647.7
  Top Layer w8: U3.7@2111.38,2546.46 2111.38,2595.16 2143.31,2627.09 v2(2143.31,2679.52)
  Bottom Layer w8: P4.6@490,2970 559,2901 1962.79,2901
HOLD#: U3.103 U9.7 | length 345.4
  Top Layer w8: 2121.69,1374.27 2121.69,1646.69 2131.06,1656.06 U3.103@2131.06,1715.75
HTBD: D18.C D19.1 Q7.5 T1.10 TP14.1
  other v4: 2160.5,3300.81 2205.5,3300.81 2250.5,3300.81 2295.5,3300.81 2160.5,3340.81 2205.5,3340.81 2250.5,3340.81 2295.5,3340.81 2160.5,3380.81 2205.5,3380.81 2250.5,3380.81 2295.5,3380.81 2160.5,3420.81 2205.5,3420.81 2250.5,3420.81 2295.5,3420.81
HTR0: D12.1 D13.C Q4.5 T1.4 TP11.1
  other v1: 1160,3325 1160,3425 1160,3520 1160,3615 985,3745 1160,3745 985,3840 1160,3845 985,3935 1160,3935
  other v4: 910,3305 955,3305 1000,3305 1045,3305 910,3345 955,3345 1000,3345 1045,3345 910,3385 955,3385 1000,3385 1045,3385 910,3425 955,3425 1000,3425 1045,3425
HTR1: D14.C D15.1 Q5.5 T1.6 TP12.1
  other v1: 1560,3415 1375,3615 1560,3615 1390,3745 1565,3745 1390,3840 1565,3845 1390,3935 1565,3935
  other v4: 1305,3300 1350,3300 1395,3300 1440,3300 1305,3340 1350,3340 1395,3340 1440,3340 1305,3380 1350,3380 1395,3380 1440,3380 1305,3420 1350,3420 1395,3420 1440,3420
HTRA: D16.C D17.1 Q6.5 T1.8 TP13.1
  other v1: 1960,3415 1960,3615 1770,3750 1955,3750 1770,3845 1955,3845 1770,3940 1955,3940
  other v4: 1705,3300 1750,3300 1795,3300 1840,3300 1705,3340 1750,3340 1795,3340 1840,3340 1705,3380 1750,3380 1795,3380 1840,3380 1705,3420 1750,3420 1795,3420 1840,3420
I2C_SCL: P5.1 U3.70 | length 2835.8
  Top Layer w8: P5.1@200,1440 P5.1@220,1440 275,1495 275,1573.79 346.5,1645.29 346.5,1661.5 390,1705 1070.55,1705 1145.55,1780 1240.8,1780 1286.79,1825.98 U3.70@1469.65,1825.98 1510.98,1825.98 1531.08,1846.08 1531.08,1906.08 1575,1950 v2(1695,1950) ; v2(2335,1695) 2368.71,1695 2408.71,1655 2485,1655 v2(2500,1670)
  Bottom Layer w8: v2(1695,1950) 1708.5,1936.5 1886.5,1936.5 1886.5,1939.73 1900.27,1953.5 1921.5,1953.5 1938.5,1936.5 2246.07,1936.5 2335,1847.57 v2(2335,1695)
I2C_SDA: P5.2 U3.9 | length 2462.9
  Top Layer w8: P5.2@220,1540 331.5,1651.5 331.5,1667.71 383.79,1720 1064.34,1720 1154.34,1810 v2(1235,1810) ; U3.9@2072.01,2546.46 2072.01,2502.99 2080,2495 v2(2080,2385)
  Bottom Layer w8: v2(1235,1810) 1328.5,1903.5 1328.5,1953.5 1355,1980 1435,1980 1480,2025 1480,2084.2 1539.3,2143.5 1863.5,2143.5 2080,2360 v2(2080,2385)
INPUT_GND: C24.1 C58.2 C59.2 DA4.3 J1.4 R24.1 U6.2 U6.8 | length 383.9
  Top Layer w22: v1(316.1,2156.1) R24.1@405,2156.1 ; v1(445.88,2550) DA4.3@518.28,2550 ; v1(615,2750) 646.3,2750 650,2753.7 650,2775 U6.2@724.88,2775 ; U6.8@724.88,2475 v1(814.76,2475)
MAX_ES1: C2_ES1.2 DA1.2 MAX1_ES1.1 R3_ES1.1 TP10_ES1.1 U3.76 | length 1936.5
  Top Layer w8: v5(1565,1605) 1565,1635 1599.57,1669.57 U3.76@1599.57,1715.75 ; R3_ES1.1@2870,1633.9 R3_ES1.1@2871.1,1635 2871.3,1635.2 2871.3,1683.86 2888.44,1701 ; MAX1_ES1.1@2945,1870 2945,1757.56 2888.44,1701 ; DA1.2@3000,1659.8 3007.6,1667.4 2974,1701 2888.44,1701
  Bottom Layer w8: v5(1565,1605) 1580,1590 1677.72,1590 1845.95,1421.77 2022.57,1421.77 2074.34,1370 ; 2240.55,1370 2260.55,1390 2456.77,1390 2506.77,1440 2850,1440 ; 2850,1636.97 2875,1611.97 ; MAX1_ES1.1@2945,1870 TP10_ES1.1@2945,1990
  other v2: 2860,1611.97
MAX_ES2: C2_ES2.2 DA2.2 MAX1_ES2.1 R3_ES2.1 TP10_ES2.1 U3.22 | length 2922.5
  Top Layer w8: U3.22@1816.1,2546.46 1816.1,2331.1 1800,2315 1800,2205.47 1855.47,2150 1855.47,1859.53 1915,1800 v2(1920,1800) ; v2(3680,1601.97) 3701.1,1623.07 3701.1,1683.66 3727.44,1710 3800,1710 ; MAX1_ES2.1@3775,1870 3775,1735 3837.6,1672.4 DA2.2@3835,1669.8
  Bottom Layer w8: v2(1920,1800) 1920,1770 2110,1580 2164.45,1580 2224.45,1520 2246.21,1520 2306.21,1460 2435,1460 2475,1500 ; 2916.21,1696.97 2945.9,1726.66 3535.11,1726.66 3576,1685.77 3576,1665.97 3640,1601.97 v2(3680,1601.97) ; MAX1_ES2.1@3775,1870 TP10_ES2.1@3775,1990
MAX_ES3: C2_ES3.2 DA3.2 MAX1_ES3.1 R3_ES3.1 TP10_ES3.1 U3.78 | length 2012.3
  Top Layer w8: v5(1630,1645) 1630,1655 1638.94,1663.94 U3.78@1638.94,1715.75 ; 3258.07,1606.97 R3_ES3.1@3286.1,1635 3286.1,1676.1 3325.43,1715.43 3380.43,1715.43 3405,1740 3405,1825 MAX1_ES3.1@3360,1870 ; C2_ES3.2@3284.95,1675 C2_ES3.2@3284.95,1676.41 ; 3380,1715 3422.6,1672.4 DA3.2@3420,1669.8
  Bottom Layer w8: v5(1630,1645) 1665.15,1645 1858.38,1451.77 2035,1451.77 2086.77,1400 2228.13,1400 2248.13,1420 2444.34,1420 2494.34,1470 ; 2886.21,1666.97 2951.21,1601.97 3133.74,1601.97 ; 3157.24,1625.47 3221.5,1625.47 v2@3240,1606.97 ; 3225,1606.97 v2(3243.07,1606.97) ; MAX1_ES3.1@3360,1870 TP10_ES3.1@3360,1990
MCCDZ: P5.14 U3.72 | length 813.8
  Top Layer w8: P5.14@800,1540 845,1585 1160,1585 1270,1695 1270,1766.77 1289.84,1786.61 U3.72@1469.65,1786.61
MCCK: P5.12 U3.71 | length 922
  Top Layer w8: P5.12@700,1540 760,1600 1153.79,1600 1255,1701.21 1255,1772.98 1288.32,1806.3 U3.71@1469.65,1806.3
MCDZ0: P5.10 U3.107 | length 2494.6
  Top Layer w8: v2(370,1645) 415,1690 1076.77,1690 1130.27,1743.5 v2(1173.5,1743.5) ; v2(2150,1540) 2225,1540 2250,1565 2250,1621.77 2209.8,1661.96 U3.107@2209.8,1715.75
  Bottom Layer w8: v2(370,1645) 415,1600 540,1600 P5.10@600,1540 ; v2(1173.5,1743.5) 1185,1732 1185,1721.21 1206.21,1700 1588.13,1700 1601.63,1713.5 1681.5,1713.5 1880,1515 2125,1515 v2(2150,1540)
MCDZ1: P5.9 U3.81 | length 1290.3
  Top Layer w8: P5.9@620,1440 660.53,1399.47 703.21,1399.47 936.79,1399.47 1067.31,1530 1622.43,1530 1697.99,1605.57 U3.81@1697.99,1715.75
MCDZ2: P5.11 U3.80 | length 1136.2
  Top Layer w8: v2(985,1485) 1045,1545 1616.21,1545 1678.31,1607.09 U3.80@1678.31,1715.75
  Bottom Layer w8: P5.11@720,1440 765,1485 v2(985,1485)
MCDZ3: P5.13 U3.79 | length 1015.6
  Top Layer w8: P5.13@820,1440 879.47,1499.47 959.47,1499.47 1020,1560 1610,1560 1658.5,1608.5 1658.5,1715.63 U3.79@1658.62,1715.75
MIN_ES1: C1_ES1.2 DA1.1 MIN1_ES1.1 R2_ES1.1 TP9_ES1.1 U3.77 | length 2113.3
  Top Layer w8: v5(1600.76,1618.99) 1600.76,1648.99 1619.25,1667.49 U3.77@1619.25,1715.75 ; DA1.1@3075,1660 3130,1715 3183.03,1715 ; MIN1_ES1.1@3145,2110 3210,2045 3210,1741.97 3183.03,1715 ; 3180,1601.97 3214,1635.97 C1_ES1.2@3214,1676.97 ; C1_ES1.2@3213.9,1684.13 3183.03,1715
  Bottom Layer w8: v5(1600.76,1618.99) 1637.22,1618.99 1648.23,1630 1658.93,1630 1852.17,1436.77 2028.79,1436.77 2080.55,1385 ; 2234.34,1385 2254.34,1405 2450.55,1405 2500.55,1455 ; 2880,1651.97 2945,1586.97 3139.95,1586.97 3154.95,1601.97 3180,1601.97 ; TP9_ES1.1@3145,2011.97 MIN1_ES1.1@3145,2110
  other v2: 3165,1601.97
MIN_ES2: C1_ES2.2 DA2.1 MIN1_ES2.1 R2_ES2.1 TP9_ES2.1 U3.19 | length 3459.9
  Top Layer w8: U3.19@1875.16,2546.46 1875,2546.3 1875,2485 1870.47,2480.47 1870.47,1869.53 1900,1840 1935,1840 v2(1950,1825) ; DA2.1@3915,1669.8 3912.4,1672.4 3945,1705 4028.03,1705 ; MIN1_ES2.1@3975,2110 4035,2050 4035,1711.97 4028.03,1705 ; v2(3981.97,1596.97) 4010.87,1596.97 R2_ES2.1@4048.9,1635 4048.9,1684.13 4028.03,1705
  Bottom Layer w8: v2(1950,1825) 1950,1761.21 2116.21,1595 2170.66,1595 2230.66,1535 2255,1535 2315,1475 2425,1475 2465,1515 ; 2910,1711.97 2939.69,1741.66 3768.34,1741.66 3913.03,1596.97 v2(3981.97,1596.97) ; TP9_ES2.1@3975,2011.97 MIN1_ES2.1@3975,2110
MIN_ES3: C1_ES3.2 DA3.1 MIN1_ES3.1 R2_ES3.1 TP9_ES3.1 U3.100 | length 2235.2
  Top Layer w8: v5(2065,1540) 2065,1565 2072.01,1572.01 U3.100@2072.01,1715.75 ; DA3.1@3497.4,1672.4 3540,1715 3620,1715 ; MIN1_ES3.1@3560,2110 3630,2040 3630,1724.91 3620.04,1714.96 3633.7,1701.3 3633.7,1675 R2_ES3.1@3633.7,1635 ; v2(3575,1601.97) 3615,1601.97 3633.7,1620.67 R2_ES3.1@3633.7,1636.97
  Bottom Layer w8: v5@2060,1540 2083.5,1563.5 2159.73,1563.5 2219.73,1503.5 2239.73,1503.5 2298.23,1445 2445,1445 2485,1485 ; 2922.43,1681.97 2950.46,1710 3391.97,1710 3515,1586.97 3560,1586.97 v2(3575,1601.97) ; TP9_ES3.1@3560,2011.97 MIN1_ES3.1@3560,2110
MISO: P5.4 TP7.1 U3.108 U9.5 | length 2932.4
  Top Layer w8: P5.4@300,1540 435,1675 1093.79,1675 1138.79,1720 v2(1140,1720) ; 2155,1325 2155,1495 v2(2170,1510) 2190,1510 2200,1520 2226.21,1520 2265,1558.79 2265,1640 v2(2250,1655) 2229.49,1675.51 U3.108@2229.49,1715.75 ; v2(2330,1620) 2340,1610 2558.79,1610 2585,1636.21 v2(2585,1670)
  Bottom Layer w8: v2(1140,1720) 1165,1720 1200,1685 1594.34,1685 1607.84,1698.5 1675.29,1698.5 1873.79,1500 2131.21,1500 2141.21,1510 v2(2170,1510) ; v2(2250,1655) 2295,1655 v2(2330,1620) ; v2(2585,1670) v2@2590,1670
MOD0E1: TP37_M1.1 U3.84 U7_M1.24 | length 1935.1
  Top Layer w8: U7_M1.24@308.51,1057.2 v2(308.51,1117.64) ; v2@325,1300 325,1310 369.47,1354.47 955.43,1354.47 1085.95,1485 1641.07,1485 1746.5,1590.43 1746.5,1663.37 1757.05,1673.92 U3.84@1757.05,1715.75
  Bottom Layer w8: v2(308.51,1117.64) 308.51,1123.57 323.72,1138.77 TP37_M1.1@323.72,1250.77 v2(323.72,1308.71)
MOD0E2: TP37_M2.1 U3.135 U7_M2.24 | length 1236.8
  Top Layer w8: U7_M2.24@988.51,1057.2 v2(988.51,1117.64) ; 1863.5,1580.15 v2(1863.5,1625) ; v2(1960,1900) 1960,2072.57 2185.85,2298.43 U3.135@2300.35,2298.43
  Bottom Layer w8: v2(988.51,1117.64) 988.51,1123.57 1003.72,1138.77 TP37_M2.1@1003.72,1250.77 1003.72,1298.71 ; v2(1863.5,1625) 1863.5,1651.07 1875,1662.57 1875,1853.79 1892.71,1871.5 1929.73,1871.5 1958.23,1900 v2(1960,1900)
MOD0E3: TP37_M3.1 U3.113 U7_M3.24 | length 1252.1
  Top Layer w8: U3.113@2300.35,1865.35 2534.09,1865.35 2688.5,1710.95 2688.5,1413.65 2589.85,1315 ; U7_M3.24@2348.51,1057.2 v2(2348.51,1117.64) ; v2(2363.75,1303.74) 2380.01,1320 2467.34,1320
  Bottom Layer w8: v2(2348.51,1117.64) 2348.51,1123.57 2363.72,1138.77 TP37_M3.1@2363.72,1250.77 v2@2363.72,1303.71
MOD0E4: TP37_M4.1 U3.120 U7_M4.24 | length 1501.4
  Top Layer w8: U3.120@2300.35,2003.15 2302.2,2005 2360.69,2005 2368.1,1997.59 2529.13,1997.59 2780,1746.73 2780,1411.36 ; 2728.85,1330 3017.49,1330 v2(3043.72,1303.77) ; U7_M4.24@3028.51,1057.2 v2(3028.51,1117.64)
  Bottom Layer w8: v2(3028.51,1117.64) 3028.51,1123.57 3043.72,1138.77 TP37_M4.1@3043.72,1250.77 v2(3043.72,1303.77)
MOD0E_Z: TP19.1 U3.96 U5.24 | length 661.2
  Top Layer w8: U5.24@1668.55,1057.17 v5(1668.55,1117.61) ; 1791.26,1380.19 1993.27,1582.2 U3.96@1993.27,1715.75
  Bottom Layer w8: v5@1668.55,1123.54 1683.75,1138.74 TP19.1@1683.75,1239.74 v5(1683.75,1298.74)
MOD1E1: TP36_M1.1 U3.83 U7_M1.25 | length 1935.7
  Top Layer w8: U7_M1.25@282.92,1057.2 v2(282.92,1137.05) ; v2@285,1290 285,1305 349.47,1369.47 949.21,1369.47 1079.74,1500 1634.85,1500 1731.5,1596.65 1731.5,1669.59 1737.36,1675.45 U3.83@1737.36,1715.75
  Bottom Layer w8: v2(282.92,1137.05) 282.92,1189.98 TP36_M1.1@283.72,1190.77 v2(283.72,1288.71)
MOD1E2: TP36_M2.1 U3.140 U7_M2.25 | length 1304.9
  Top Layer w8: U7_M2.25@962.92,1057.2 v2(962.92,1137.05) ; 1840,1577.87 v2(1840,1598.64) ; v2(1920,1895) 1945,1920 1945,2078.79 2191.5,2325.29 2191.5,2379.73 2208.62,2396.85 U3.140@2300.35,2396.85
  Bottom Layer w8: v2(962.92,1137.05) 962.92,1189.98 TP36_M2.1@963.72,1190.77 963.72,1238.74 ; 963.75,1238.77 v2(963.75,1283.74) ; v2(1840,1598.64) 1840,1648.79 1860,1668.79 1860,1860 1895,1895 v2(1920,1895)
MOD1E3: TP36_M3.1 U3.117 U7_M3.25 | length 1339.8
  Top Layer w8: U3.117@2300.35,1944.09 v2(2378.11,1944.09) ; U7_M3.25@2322.92,1057.2 v2(2322.92,1137.05) ; v2(2323.75,1278.74) 2323.75,1301.26 2357.49,1335 2461.13,1335 ; v2(2415,1835) 2435,1815 2447.02,1815 2482.02,1780 2598.23,1780 2673.5,1704.73 2673.5,1419.86 2583.64,1330
  Bottom Layer w8: v2(2322.92,1137.05) 2322.92,1189.98 TP36_M3.1@2323.72,1190.77 v2@2323.72,1270.77 ; v2(2378.11,1944.09) 2365,1930.98 2365,1860 2390,1835 v2(2415,1835)
MOD1E4: TP36_M4.1 U3.119 U7_M4.25 | length 1410.7
  Top Layer w8: U3.119@2300.35,1983.46 2301.36,1982.45 2362.02,1982.45 2362.16,1982.59 2522.92,1982.59 2765,1740.51 2765,1405.15 ; 2722.64,1315 2967.49,1315 v2(3003.72,1278.77) ; U7_M4.25@3002.92,1057.2 v2(3002.92,1137.05)
  Bottom Layer w8: v2(3002.92,1137.05) 3002.92,1189.98 TP36_M4.1@3003.72,1190.77 v2@3003.72,1270.77
MOD1E_Z: TP18.1 U3.95 U5.25 | length 659.2
  Top Layer w8: U5.25@1642.95,1057.17 v5(1642.95,1137.02) ; 1751.26,1361.41 1973.58,1583.73 U3.95@1973.58,1715.75
  Bottom Layer w8: v5(1642.95,1137.02) TP18.1@1642.95,1189.94 ; TP18.1@1643.75,1190.74 v5@1643.75,1270.74
  other v5: 1643.75,1278.74
MOD2E1: TP35_M1.1 U3.82 U7_M1.26 | length 1963.3
  Top Layer w8: v2@245,1310 319.47,1384.47 943,1384.47 1073.53,1515 1628.64,1515 1716.5,1602.86 1716.5,1714.57 U3.82@1717.68,1715.75 ; U7_M1.26@257.33,1057.2 v2(257.33,1117.64)
  Bottom Layer w8: v2(243.72,1308.71) TP35_M1.1@243.72,1250.77 243.72,1131.25 v2(257.33,1117.64)
MOD2E2: TP35_M2.1 U3.141 U7_M2.26 | length 1621.1
  Top Layer w8: U7_M2.26@937.33,1057.2 v2(937.33,1117.64) ; 1625.92,1385 1815,1574.08 v2(1815,1625) ; v2(1910,1930) 1910,1955 1930,1975 1930,2085 2170,2325 2170,2384.07 2202.46,2416.54 U3.141@2300.35,2416.54
  Bottom Layer w8: 923.72,1303.71 TP35_M2.1@923.72,1250.77 923.72,1131.25 v2(937.33,1117.64) ; v2(1815,1625) 1815,1645 1845,1675 1845,1866.21 1908.79,1930 v2(1910,1930)
MOD2E3: TP35_M3.1 U3.131 U7_M3.26 | length 1817
  Top Layer w8: v2(2283.75,1303.74) 2330.01,1350 2454.92,1350 ; U7_M3.26@2297.33,1057.2 v2(2297.33,1117.64) ; U3.131@2300.35,2219.68 2454.65,2219.68 2492.84,2181.5 2613.5,2181.5 2665,2130 v2(2665,2105) ; 2577.43,1345 2658.5,1426.07 2658.5,1686.5 v2(2620,1725)
  Bottom Layer w8: v2@2283.72,1303.71 TP35_M3.1@2283.72,1250.77 2283.72,1131.25 v2(2297.33,1117.64) ; v2(2620,1725) 2557.43,1725 2520,1762.43 2520,1960 v2(2665,2105)
MOD2E4: TP35_M4.1 U3.118 U7_M4.26 | length 1333.9
  Top Layer w8: U3.118@2300.35,1963.78 2364.56,1963.78 2368.38,1967.59 2516.71,1967.59 2750,1734.3 2750,1398.93 ; 2726.42,1290 v2(2917.49,1290) ; U7_M4.26@2977.33,1057.2 v2(2977.33,1117.64)
  Bottom Layer w8: v2@2917.49,1292 2963.72,1245.77 2963.72,1131.25 v2(2977.33,1117.64)
MOD2E_Z: TP17.1 U3.94 U5.26 | length 409
  Top Layer w8: v5(1573.75,1288.74) 1573.75,1317.62 ; U5.26@1617.36,1057.17 v5(1617.36,1117.61) ; 1953.9,1585.26 U3.94@1953.9,1715.75
  Bottom Layer w8: v5(1573.75,1288.74) 1603.75,1258.74 1603.75,1131.22 v5(1617.36,1117.61)
MODE0_EXP1: P6.1 U3.27 | length 2044
  Top Layer w8: v2(1605,2340) 1624.85,2359.85 1624.85,2377.28 1717.68,2470.1 U3.27@1717.68,2546.46
  Bottom Layer w8: P6.1@200,1815 155,1860 155,1965 230,2040 455.15,2040 555.15,2140 905.15,2140 1004.15,2239 1294,2239 1350,2295 1588.79,2295 1605,2311.21 v2(1605,2340)
MODE0_EXP2: P6.2 U3.26 | length 1900.9
  Top Layer w8: v2(1630,2315) 1630,2343.79 1639.85,2353.64 1639.85,2371.06 1737.36,2468.58 U3.26@1737.36,2546.46
  Bottom Layer w8: P6.2@200,1915 215,1930 215,1980 260,2025 461.36,2025 561.36,2125 911.36,2125 1010.36,2224 1300.21,2224 1356.21,2280 1595,2280 v2(1630,2315)
MODE1_EXP1: P6.3 U3.25 | length 1988.8
  Top Layer w8: v2(1654.85,2335.4) 1654.85,2364.85 1757.05,2467.05 U3.25@1757.05,2546.46
  Bottom Layer w8: P6.3@300,1815 300,1830 270,1860 270,1990 290,2010 467.57,2010 567.57,2110 917.57,2110 1016.57,2209 1306.43,2209 1362.43,2265 1618.79,2265 1654.85,2301.06 v2(1654.85,2335.4)
MODE1_EXP2: P6.4 U3.24 | length 1855.3
  Top Layer w8: v2(1678.35,2313.35) 1678.35,2367.14 1776.73,2465.52 U3.24@1776.73,2546.46
  Bottom Layer w8: P6.4@300,1915 320,1935 320,1980 335,1995 473.79,1995 573.79,2095 923.79,2095 1022.79,2194 1312.64,2194 1368.64,2250 1635,2250 1678.35,2293.35 v2(1678.35,2313.35)
MODE2_EXP1: P6.5 U3.23 | length 1916.3
  Top Layer w8: v2(1701.85,2336.85) 1701.85,2369.42 1796.42,2463.99 U3.23@1796.42,2546.46 1793.64,2549.24 U3.23@1793.64,2555
  Bottom Layer w8: P6.5@400,1815 400,1835 370,1865 370,1940 410,1980 480,1980 580,2080 930,2080 1028.5,2178.5 1318.35,2178.5 1374.85,2235 1641.21,2235 1701.85,2295.64 v2(1701.85,2336.85)
MODE2_EXP2: P6.6 U3.14 | length 1899.8
  Top Layer w8: v2(1910,2400) 1973.58,2463.58 U3.14@1973.58,2546.46
  Bottom Layer w8: P6.6@400,1915 415,1915 465,1965 486.21,1965 586.21,2065 938.23,2065 1024.23,2151 1045.77,2151 1065.27,2131.5 1292.57,2131.5 1381.07,2220 1647.43,2220 1827.43,2400 v2(1910,2400)
MOSI: P5.6 TP8.1 U3.109 U9.2 | length 2671.2
  Top Layer w8: P5.6@400,1540 505,1645 1120,1645 v2(1140,1665) ; U9.2@2030,1385 2050,1405 ; 2065,1405 v2(2065,1455) ; v2(2230,1480) 2295,1545 2295,1635 2327.5,1667.5 2310,1685 2310,1765 U3.109@2290,1785 ; 2327.5,1668.5 2372.71,1668.5 2401.21,1640 2510,1640 2540,1670 v2(2535,1670)
  Bottom Layer w8: v2(1140,1665) 1165,1665 1175,1655 1606.77,1655 1620.27,1668.5 1662.86,1668.5 1861.36,1470 2050,1470 v2(2065,1455) 2205,1455 v2(2230,1480)
NetC3_M1_1: C3_M1.1 D20_M1.A M1_M1.4 U7_M1.5 | length 774.4
  Top Layer w12: 308.51,796.02 U7_M1.5@308.51,832.8
  Top Layer w15: 289.49,729.48 293.25,733.24 293.25,780.76 308.51,796.02
  Top Layer w39: D20_M1.A@230,470 D20_M1.A@231.49,470 ; D20_M1.A@246.49,485 236.77,475.28 236.77,393.14 455,174.91 M1_M1.4@455,145 ; D20_M1.A@246.49,520 246.49,686.48 289.49,729.48
NetC3_M2_1: C3_M2.1 D20_M2.A M1_M2.4 U7_M2.5 | length 770.1
  Top Layer w12: 988.51,796.02 U7_M2.5@988.51,832.8
  Top Layer w15: 969.49,729.48 973.25,733.24 973.25,780.76 988.51,796.02
  Top Layer w39: C3_M2.1@917.26,396 917.26,327.74 1045,200 M1_M2.4@1045,145 ; C3_M2.1@917.49,396 917.49,511 926.49,520 926.49,686.48 969.49,729.48
NetC3_M3_1: C3_M3.1 D20_M3.A M1_M3.4 U7_M3.5 | length 1079.9
  Top Layer w12: 2348.51,796.02 U7_M3.5@2348.51,832.8
  Top Layer w15: 2329.49,729.48 2333.25,733.24 2333.25,780.76 2348.51,796.02
  Top Layer w39: v1(2282.16,327.84) 2282.16,506.33 2277.49,511 2286.49,520 2286.49,686.48 2329.49,729.48 ; v1(2615,145) M1_M3.4@2750,145
  Bottom Layer w39: v1(2282.16,327.84) 2378.5,231.5 2528.5,231.5 v1(2615,145)
NetC3_M4_1: C3_M4.1 D20_M4.A M1_M4.4 U7_M4.5 | length 977.5
  Top Layer w12: 3028.51,796.02 U7_M4.5@3028.51,832.8
  Top Layer w15: 3009.49,729.48 3013.25,733.24 3013.25,780.76 3028.51,796.02
  Top Layer w39: 3009.49,729.48 2966.49,686.48 2966.49,520 2957.26,510.77 C3_M4.1@2957.26,396 2957.26,362.74 3128.5,191.5 3183.45,191.5 3229.95,145 M1_M4.4@3345,145
NetC5_M1_1: C5_M1.1 D21_M1.A M1_M1.3 U7_M1.7 | length 810.8
  Top Layer w12: 359.69,747.2 U7_M1.7@359.69,832.8
  Top Layer w18: 337.49,725 359.69,747.2
  Top Layer w39: 337.49,725 336.77,405 336.77,368.28 473.55,231.5 513.5,231.5 555,190 M1_M1.3@555,145
NetC5_M2_1: C5_M2.1 D21_M2.A M1_M2.3 U7_M2.7 | length 749.8
  Top Layer w12: 1039.69,747.2 U7_M2.7@1039.69,832.8
  Top Layer w18: 1017.49,725 1039.69,747.2
  Top Layer w39: 1017.49,725 1017.49,372.51 1145,245 M1_M2.3@1145,145
NetC5_M3_1: C5_M3.1 D21_M3.A M1_M3.3 U7_M3.7 | length 1074.7
  Top Layer w12: 2399.69,747.2 U7_M3.7@2399.69,832.8
  Top Layer w18: 2377.49,725 2399.69,747.2
  Top Layer w39: 2377.49,725 2377.49,611 D21_M3.A@2366.49,600 2377.26,589.23 2377.26,396 2377.26,377.68 2514.95,240 2810,240 2850,200 M1_M3.3@2850,145
NetC5_M4_1: C5_M4.1 D21_M4.A M1_M4.3 U7_M4.7 | length 951.4
  Top Layer w12: 3079.69,747.2 U7_M4.7@3079.69,831.8 U7_M4.7@3079.69,832.8
  Top Layer w18: 3057.49,725 3079.69,747.2
  Top Layer w39: 3057.49,725 3057.26,724.77 C5_M4.1@3057.26,396 3057.26,382.74 3208.5,231.5 3368.4,231.5 3445,154.9 M1_M4.3@3445,145
NetC6_M1_1: C6_M1.1 D22_M1.A M1_M1.1 U7_M1.10 | length 573.5
  Top Layer w12: 436.47,796.02 U7_M1.10@436.47,832.8
  Top Layer w15: 436.47,796.02 453.49,779 453.49,729
  Top Layer w39: 453.49,729 503.49,679 503.49,520 D22_M1.A@512.49,511 ; 643.74,295 685,295 755,225 M1_M1.1@755,145
NetC6_M2_1: C6_M2.1 D22_M2.A M1_M2.1 U7_M2.10 | length 782.5
  Top Layer w12: 1116.47,796.02 U7_M2.10@1116.47,832.8
  Top Layer w15: 1116.47,796.02 1133.49,779 1133.49,729
  Top Layer w39: 1133.49,729 1183.49,679 1183.49,520 1187.72,515.77 C6_M2.1@1187.72,395 1187.72,373.59 1345,216.31 M1_M2.1@1345,145
NetC6_M3_1: C6_M3.1 D22_M3.A M1_M3.1 U7_M3.10 | length 1096.1
  Top Layer w12: 2476.47,796.02 U7_M3.10@2476.47,832.8
  Top Layer w15: 2476.47,796.02 2493.49,779 2493.49,729
  Top Layer w39: 2493.49,729 2543.49,679 D22_M3.A@2543.49,485 2543.49,394.97 2603.46,335 2895,335 3050,180 M1_M3.1@3050,145
NetC6_M4_1: C6_M4.1 D22_M4.A M1_M4.1 U7_M4.10 | length 996.4
  Top Layer w12: 3156.47,796.02 U7_M4.10@3156.47,832.8
  Top Layer w15: 3156.47,796.02 3173.49,779 3173.49,729
  Top Layer w39: 3173.72,728.77 3173.72,696.77 3204.24,666.24 3204.24,650.72 3204.49,650.48 3204.49,549.52 3232.49,521.52 D22_M4.A@3232.49,511 ; D22_M4.A@3223.49,485 3227.72,480.77 C6_M4.1@3227.72,395 3227.72,357.28 3260,325 3480,325 3645,160 M1_M4.1@3645,145
NetC8_M1_1: C8_M1.1 D23_M1.A M1_M1.2 U7_M1.8 | length 862.1
  Top Layer w12: 385.29,747.2 U7_M1.8@385.29,832.8
  Top Layer w18: 385.29,747.2 407.49,725
  Top Layer w39: 407.49,725 407.49,611 D23_M1.A@418.49,600 410,591.51 410,360.11 457.87,312.24 552.76,312.24 655,210 M1_M1.2@655,145
NetC8_M2_1: C8_M2.1 D23_M2.A M1_M2.2 U7_M2.8 | length 772.4
  Top Layer w12: 1065.29,747.2 U7_M2.8@1065.29,832.8
  Top Layer w18: 1065.29,747.2 1087.49,725
  Top Layer w39: 1087.49,725 1087.49,611 D23_M2.A@1098.49,600 1087.72,589.23 C8_M2.1@1087.72,395 1087.72,380.23 1177.95,290 1180,290 1245,225 M1_M2.2@1245,145
NetC8_M3_1: C8_M3.1 D23_M3.A M1_M3.2 U7_M3.8 | length 1103.7
  Top Layer w12: 2425.29,747.2 U7_M3.8@2425.29,832.8
  Top Layer w18: 2425.29,747.2 2447.49,725
  Top Layer w39: 2447.49,725 2447.49,395.23 2447.72,395 2447.72,372.28 2531,289 2870,289 2950,209 M1_M3.2@2950,145